# Altium PCB Jlink_V9.PcbDoc
Units mm, origin at the board's own origin, x right, y up, seen from the top; angles counter-clockwise.
Board outline 43 x 15.11 mm, 2 copper layers (Top Layer, Bottom Layer); 51 components, 39 nets, 205 pads, 94 vias.
Unrouted connection lines stored in the file: 4.
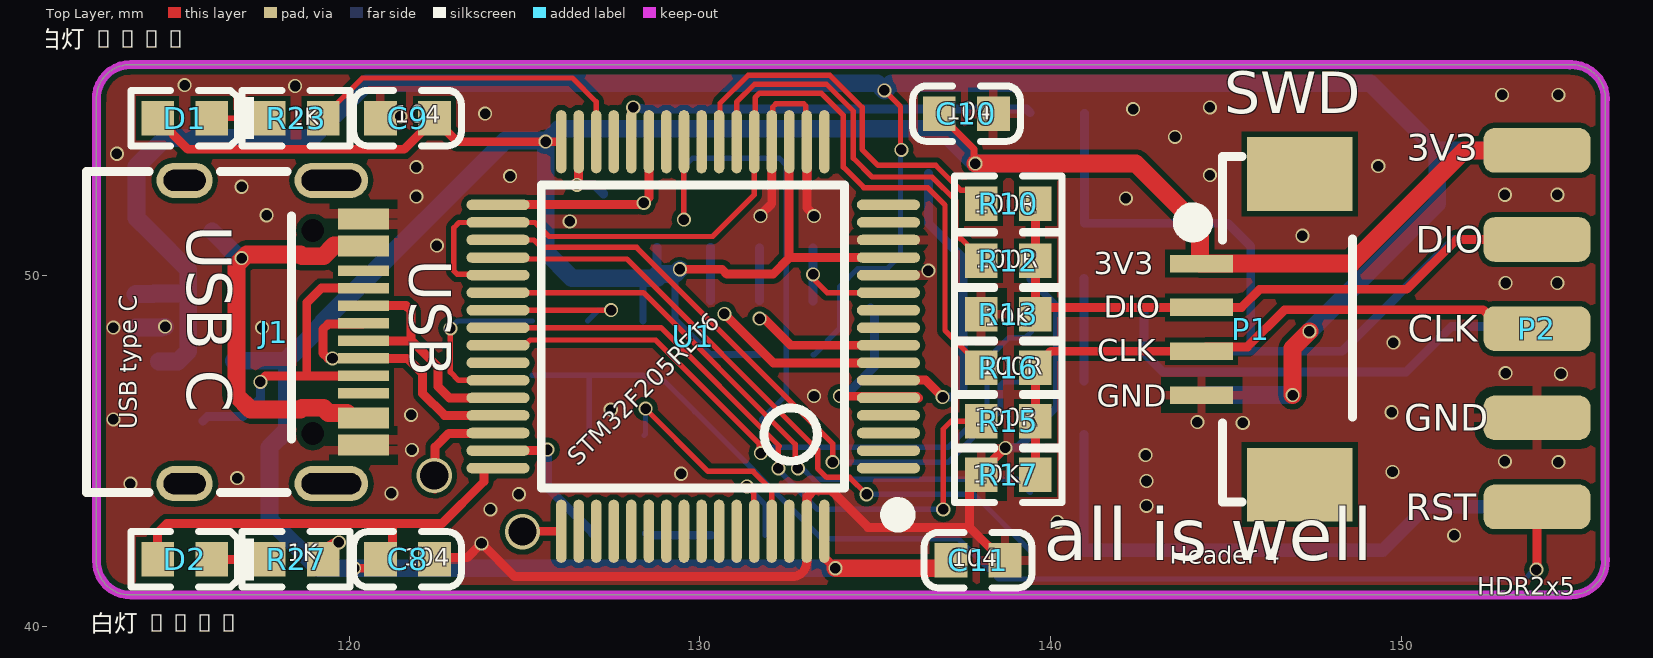
[diagram p0: Top Layer view]
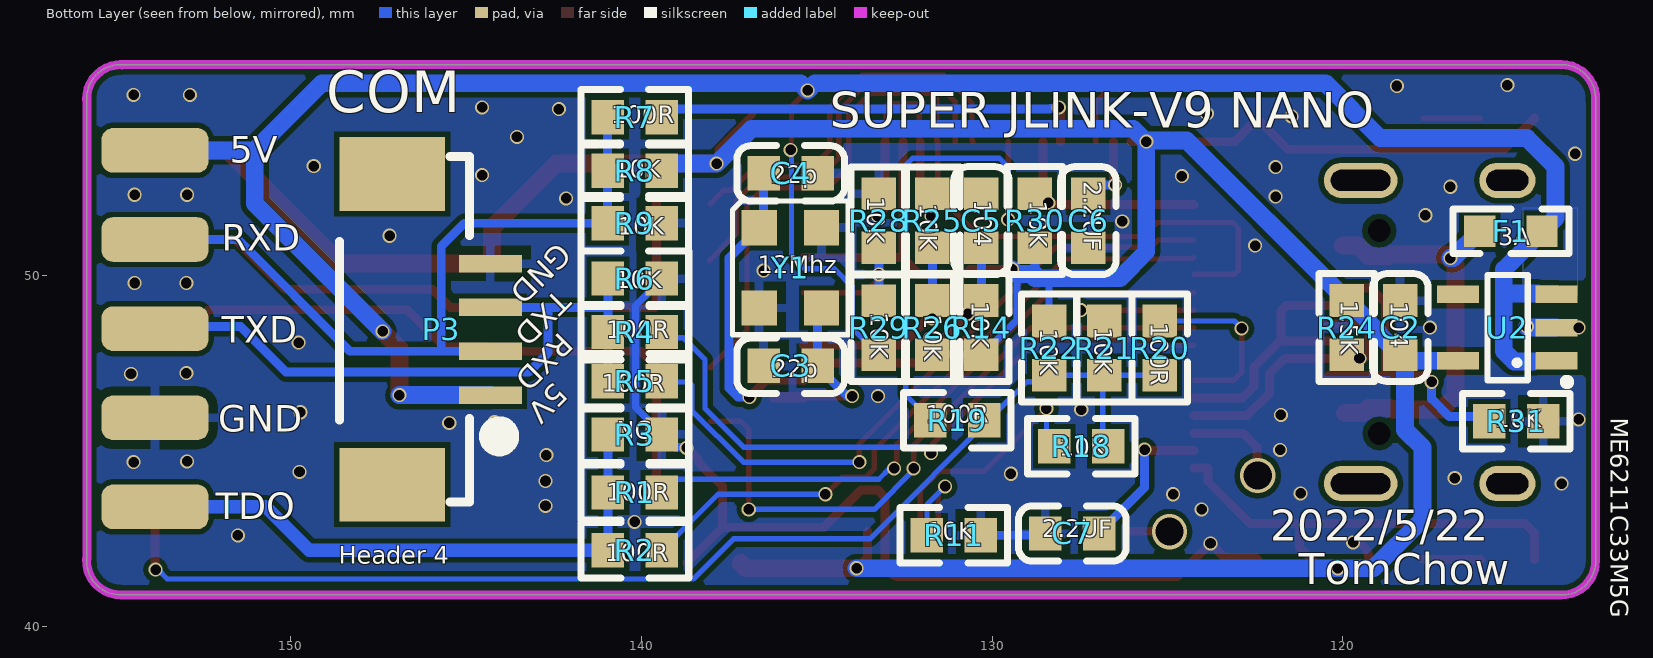
[diagram p1: Bottom Layer view, seen from below]
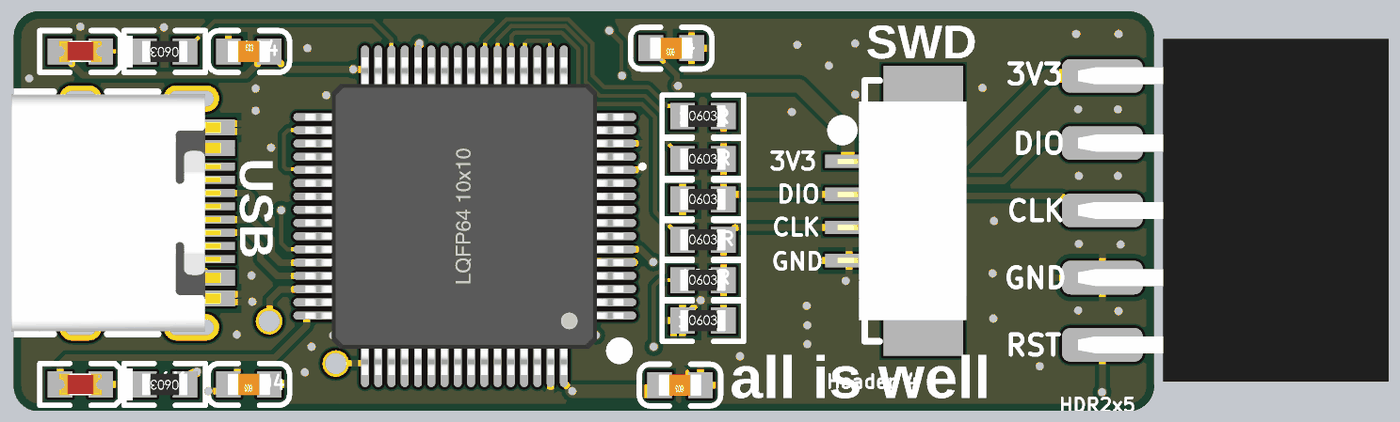
[diagram p2: 3D render of the assembled board from above, using the file's embedded part models]
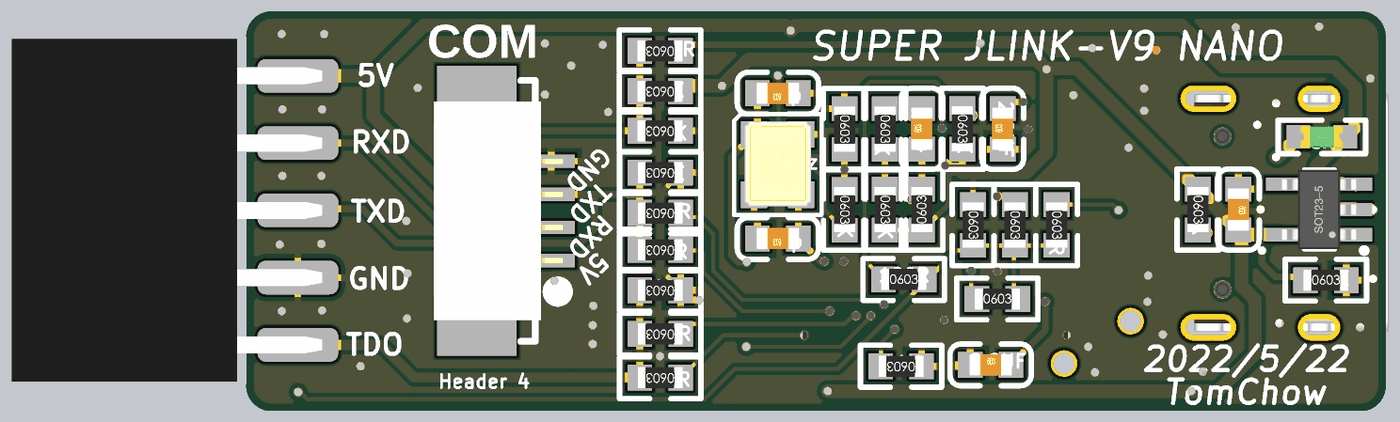
[diagram p3: 3D render of the assembled board from below, using the file's embedded part models]

## Layer stack, top to bottom
Top Solder: solder mask 0.0102, Solder Resist, Dk 3.5
Top Layer: signal copper 0.0356
Dielectric 1: dielectric 0.32, FR-4, Dk 4.8
Bottom Layer: signal copper 0.0356
Bottom Solder: solder mask 0.0102, Solder Resist, Dk 3.5

## Board outline
112.801,41.885 112.801,54.991 112.802,54.991 cw(c113.767,55.042) 113.792,56.007 154.838,56.007 154.783,56.002 cw(c154.834,55.038) 155.799,55.012 155.792,55.053 155.792,41.915 155.798,41.915 cw(c154.834,41.864) 154.808,40.899 154.808,40.894 113.792,40.894 113.817,40.895 cw(c113.767,41.859)

## Design rules (kind name [scope] priority, off if disabled: settings)
Clearance [All] p1: gap=0.152 ignorepadtopadclearanceinfootprint=FALSE
PolygonConnect isvia [IsVia] p1: connectstyle=Direct reliefconductorwidth=0.254 reliefentries=4 polygonreliefangle="90 Angle" airgapwidth=0.254
PolygonConnect [All] p2: connectstyle=Relief reliefconductorwidth=0.254 reliefentries=4 polygonreliefangle="90 Angle" airgapwidth=0.254
RoutingVias [All] p1: holewidth=0.3 width=0.4 viastyle="Through Hole" minholewidth=0.3 minwidth=0.4 maxholewidth=0.3 maxwidth=0.4
SolderMaskExpansion [All] p1: expansion=0.102 istentingtop=FALSE
Width [All] p1: maxlimit=0.508 minlimit=0.152 preferedwidth=0.254
30 further rules are at their usual default settings.

## Components (designator, comment, footprint, x,y, rotation, side; value= is the part's Value field where it differs from the comment)
C2 "104" LC-0603_C 118.364,48.514 r270 bottom value=105
C3 "22p" LC-0603_C 135.738,47.422 r0 bottom value=22
C4 "22p" LC-0603_C 135.738,52.908 r0 bottom value=22
C5 "104" LC-0603_C 130.302,51.562 r90 bottom
C6 "2.2UF" LC-0603_C 127.254,51.562 r90 bottom value=2.2uf
C7 "2.2UF" LC-0603_C 127.711,42.647 r180 bottom value=2.2uf
C8 "104" LC-0603_C 121.666,41.91 r180 top
C9 "104" LC-0603_C 121.666,54.483 r0 top
C10 "104" LC-0603_C 137.592,54.61 r180 top
C11 "104" LC-0603_C 137.922,41.885 r180 top
D1 "白灯 0603" 0603_LED_S1 115.316,54.483 r180 top
D2 "白灯 0603" 0603_LED_S1 115.316,41.91 r180 top
F1 "3A" "FU 0603" 115.214,51.257 r180 bottom
J1 "USB type C" "USB Type-C-16Pin_A" 115.316,48.387 r270 top
P1 "Header 4" SMT1.25_4P-90 147.091,48.463 r270 top
P2 "HDR2x5" HDR2X5_2.54_180HF 153.848,53.564 r0 top
P3 "Header 4" SMT1.25_4P-90 147.091,48.463 r90 bottom
R1 "100R" LC-0603_R 140.176,43.815 r0 bottom value=101
R2 "100R" LC-0603_R 140.176,42.164 r0 bottom value=101
R3 "NC" LC-0603_R 140.176,45.466 r0 bottom value=220K
R4 "100R" LC-0603_R 140.176,48.387 r0 bottom value=101
R5 "100R" LC-0603_R 140.176,46.99 r0 bottom value=101
R6 "10K" LC-0603_R 140.176,49.911 r0 bottom
R7 "100R" LC-0603_R 140.183,54.508 r0 bottom value=101
R8 "10K" LC-0603_R 140.183,52.984 r0 bottom
R9 "10K" LC-0603_R 140.183,51.486 r0 bottom
R10 "100R" LC-0603_R 138.787,52.045 r0 top value=101
R11 "10K" LC-0603_R 131.089,42.596 r0 bottom value=10K.
R12 "100R" LC-0603_R 138.787,50.419 r0 top value=101
R13 "10K" LC-0603_R 138.787,48.895 r0 top
R14 "10K" LC-0603_R 130.302,48.514 r90 bottom
R15 "100R" LC-0603_R 138.787,45.847 r0 top value=101
R16 "100R" LC-0603_R 138.787,47.371 r0 top value=101
R17 "10K" LC-0603_R 138.787,44.323 r0 top
R18 "10K" LC-0603_R 127.457,45.136 r180 bottom
R19 "100R" LC-0603_R 130.988,45.872 r180 bottom value=101
R20 "100R" LC-0603_R 125.222,47.93 r270 bottom value=101
R21 "10K" LC-0603_R 126.797,47.93 r270 bottom value=101
R22 "10K" LC-0603_R 128.372,47.93 r270 bottom
R23 "1K" LC-0603_R 118.491,54.483 r180 top value=102
R24 "1.5K" LC-0603_R 119.888,48.514 r270 bottom
R25 "10K" LC-0603_R 131.699,51.554 r270 bottom
R26 "10K" LC-0603_R 131.699,48.514 r270 bottom
R27 "1K" LC-0603_R 118.491,41.91 r180 top value=102
R28 "10K" LC-0603_R 133.223,51.554 r270 bottom value=103
R29 "10K" LC-0603_R 133.223,48.506 r270 bottom
R30 "10K" LC-0603_R 128.778,51.562 r270 bottom
R31 "10K" LC-0603_R 115.062,45.847 r180 bottom
U1 "STM32F205RET6" "LQFP64 10x10_N" 129.794,48.26 r90 top
U2 "ME6211C33M5G" SOT23-5N 115.319,48.514 r90 bottom
Y1 "12Mhz" OSC-3225 135.687,50.19 r180 bottom

## Footprints (in the part's own frame and the unit in brackets; to place one, negate y for a bottom-side part, rotate by r counter-clockwise, add the part's x,y. Pads: shape width x height; smd on the part's side, far side on the other; paste and mask are expansions set on the pad)
0603_LED_S1 [mm]
  rect 0.93x0.98 smd: A(0.77,0) K(-0.77,0)
  silkscreen extent -1.97,-0.79 1.54,0.79, body extent -0.8,-0.4 0.8,0.4, height 0.6
"FU 0603" [mil] "贴片保险丝"
  rect 35x35 smd: 1(-35,0) 2(35,0)
  silkscreen extent -65,-25 65,25, body extent -31,-16 31,16, height 20
HDR2X5_2.54_180HF [mil]
  rrect50% 120x50 smd: 1(0,0) 3(0,-100) 5(0,-200) 7(0,-300) 9(0,-400)
  rrect50% 120x50 smd far side: 2(0,0) 4(0,-100) 6(0,-200) 8(0,-300) 10(0,-400)
  body extent -36,-455 425,55, height 76
LC-0603_C [mm]
  rect 0.93x0.98 smd: 1(-0.77,0) 2(0.77,0)
  silkscreen extent -1.53,-0.79 1.54,0.79, body extent -0.8,-0.4 0.8,0.4, height 0.3
LC-0603_R [mm]
  rect 0.93x0.98 smd: 1(-0.77,0) 2(0.77,0)
  silkscreen extent -1.53,-0.79 1.54,0.79, body extent -0.85,-0.4 0.85,0.4, height 0.56
"LQFP64 10x10_N" [mm] "64脚，体宽10x10mm，脚距0.5mm"
  oval 0.3x1.8 smd: 1(-3.75,-5.575) 2(-3.25,-5.575) 3(-2.75,-5.575) 4(-2.25,-5.575) 5(-1.75,-5.575) 6(-1.25,-5.575) 7(-0.75,-5.575) 8(-0.25,-5.575) 9(0.25,-5.575) 10(0.75,-5.575) 11(1.25,-5.575) 12(1.75,-5.575) 13(2.25,-5.575) 14(2.75,-5.575) 15(3.25,-5.575) 16(3.75,-5.575) 33(3.75,5.55) 34(3.25,5.55) 35(2.75,5.55) 36(2.25,5.55) 37(1.75,5.55) 38(1.25,5.55) 39(0.75,5.55) 40(0.25,5.55) 41(-0.25,5.55) 42(-0.75,5.55) 43(-1.25,5.55) 44(-1.75,5.55) 45(-2.25,5.55) 46(-2.75,5.55) 47(-3.25,5.55) 48(-3.75,5.55)
  oval 1.8x0.3 smd: 17(5.55,-3.75) 18(5.55,-3.25) 19(5.55,-2.75) 20(5.55,-2.25) 21(5.55,-1.75) 22(5.55,-1.25) 23(5.55,-0.75) 24(5.55,-0.25) 25(5.55,0.25) 26(5.55,0.75) 27(5.55,1.25) 28(5.55,1.75) 29(5.55,2.25) 30(5.55,2.75) 31(5.55,3.25) 32(5.55,3.75) 49(-5.55,3.75) 50(-5.55,3.25) 51(-5.55,2.75) 52(-5.55,2.25) 53(-5.55,1.75) 54(-5.55,1.25) 55(-5.55,0.75) 56(-5.55,0.25) 57(-5.55,-0.25) 58(-5.55,-0.75) 59(-5.55,-1.25) 60(-5.55,-1.75) 61(-5.55,-2.25) 62(-5.55,-2.75) 63(-5.55,-3.25) 64(-5.55,-3.75)
  silkscreen extent -5.33,-6.09 4.32,4.32, body extent -6,-6 6,6, height 1.45
OSC-3225 [mm]
  rect 1x1 smd: 1(-0.945,1.167) 2(-0.945,-1.119) 3(0.833,-1.119) 4(0.833,1.167)
  silkscreen extent -1.71,-1.88 1.6,1.93, body extent -1.3,-1.55 1.2,1.65, height 0.65
SMT1.25_4P-90 [mm]
  rect 2.1x3 smd: 0(-4.425,0) 0(4.425,0)
  rect 0.5x1.8 smd: 1(-1.875,-2.8) 2(-0.625,-2.8) 3(0.625,-2.8) 4(1.875,-2.8)
  silkscreen extent -4.92,-3.3 4.92,1.5, body extent -4.12,-3.22 4.13,1.63, height 4.25
SOT23-5N [mm] "3x1.6x1.1mm(长宽高)"
  rect 0.5x1.2 smd: 1(-0.95,-1.4) 2(0,-1.4) 3(0.95,-1.4) 4(0.95,1.4) 5(-0.95,1.4)
  silkscreen extent -1.63,-1.78 1.5,0.56, body extent -1.5,-1.4 1.5,1.4, height 1.15
"USB Type-C-16Pin_A" [mm]
  round 0 hole 0.65: 0(-2.89,3.65) 0(2.89,3.65)
  oval 1x2.1 hole 0.6 slot 1.7 at 90 deg: 1(-4.32,4.18) 1(4.32,4.18)
  oval 1x1.6 hole 0.6 slot 1.2 at 90 deg: 1(-4.32,0) 1(4.32,0)
  rect 0.3x1.45 smd: A1(-3.375,5.092) A4(-2.6,5.092) A5(-1.25,5.092) A6(-0.25,5.092) A7(0.25,5.092) A8(-1.75,5.092) A9(2.6,5.1) A12(3.375,5.1) B1(3.075,5.1) B4(2.3,5.1) B5(1.75,5.092) B6(0.75,5.092) B7(-0.75,5.092) B8(1.25,5.092) B9(-2.3,5.092) B12(-3.075,5.092)
  silkscreen extent -4.57,-2.79 4.57,3.05, body extent -4.47,-2.6 4.47,5.3, height 3.25

## Part data
C2 C3 C4 C5 C6 C7 C8 C9 C10 C11: library part Cap, "Polarized Capacitor (Radial)", Published=8-Jun-2000, Publisher="Altium Limited", Revision="July-2002: Re-released for DXP Platform."
D1 D2: library part "0603 白灯", "发光二极管", Package=0603, SuppliersPartNumber=C2290, ComponentLink1Description=供应商链接, ComponentLink1URL=http://www.szlcsc.com/product/details_2663.html, Supplier=LC
F1: library part FU, "贴片保险丝", BOM名称=贴片保险丝, 学习资源=www.ooocke.com, 版权归属=源创客
J1: library part USB_C
P1 P3: "Header, 4-Pin", LatestRevisionDate=17-Jul-2002, LatestRevisionNote="Re-released for DXP Platform.", Publisher="Altium Limited"
P2: library part HDR2x5_2.54, "Header"
R1 R2 R3 R4 R5 R6 R7 R8 R9 R10 R11 R12 R13 R14 R15 R16 R17 R18 R19 R20 R21 R22 R23 R25 R26 R27 R28 R29 R30: library part Resistor, "Resistor Chip", Published=8-Jun-2000, Publisher="Altium Limited", Revision="July-2002: Re-released for DXP Platform."
R24 R31: library part Res2, "Resistor", LatestRevisionDate=17-Jul-2002, LatestRevisionNote="Re-released for DXP Platform.", PackageReference=AXIAL-0.4, Published=8-Jun-2000, Publisher="Altium Limited"
U1: "Microcontroller   ST", Brand=ST, Code=104261, InitialReleaseDate=25-Mar-2015, LatestRevisionDate=25-Mar-2015, PackageReference=SQFP10x10-64, Vision=V5.0
U2: library part RT9193-33, "3.3V超低压差LDO"
Y1: library part XTAL, "=Description"

## Via types
v1: diameter 0.4, hole 0.3, Top Layer to Bottom Layer, tented both sides, 92 vias
v2: diameter 1, hole 0.8, Top Layer to Bottom Layer, 2 vias

## Nets (pads, with @x,y where several pads share a name; then routed paths per layer and width w, separated by ;. In a path a pad name is that pad's centre, name@x,y a point inside that pad or via, vN(x,y) a via of type N, cw(c..) or ccw(c..) an arc to the next point about the centre after c; other vN are vias at no path point)
3V3: C2.2 C8.2 C9.2 C10.2 C11.2 D1.A D2.A P1.1 P2.1 R8.1 R14.1 R22.1 R24.1 R26.2 R30.2 U1.13 U1.19 U1.32 U1.48 U1.64 U2.5 | length 122
  Top Layer w0.203: C10.2 136.822,54.585 137.808,53.599 137.808,53.225 v1(137.846,53.188)
  Top Layer w0.254: D2.A 114.546,42.664 114.808,42.926 121.234,42.926 ; D1.A 114.546,54.458 115.41,53.594 121.572,53.594 122.436,54.458 123.084,53.81 v1(125.603,53.81) U1.32 ; v1(120.142,41.656) 120.642,41.656 C8.2 121.234,42.248 121.234,42.926 ; U1.48 123.866,44.51 123.845,44.489 123.845,44.128 122.643,42.926 121.234,42.926 ; v1(129.424,50.176) 130.627,50.176 130.765,50.038 132.08,50.038 132.535,50.493 ; U1.19 132.535,53.801 132.535,50.493 ; U1.64 133.544,41.965 133.853,41.656 v1(133.858,41.656) ; U1.13 132.552,50.51 132.535,50.493
  Top Layer w0.508: v1(133.858,41.656) 137.025,41.656 C11.2@137.152,41.783 ; C11.2@137.156,41.787 C11.2@137.156,41.812 ; v1(137.846,53.188) 142.418,53.188 144.247,51.359 144.247,50.342 P1.1@144.251,50.338 ; P1.1 P1.1@144.251,50.338 ; P2.1 151.786,53.564 148.56,50.338 P1.1@144.251,50.338
  Bottom Layer w0.203: R22.1 128.372,49.895 128.397,49.921 ; v1@129.286,50.038 129.286,48.735 130.277,47.744 R14.1 R26.2
  Bottom Layer w0.254: 128.778,50.017 R30.2
  Bottom Layer w0.508: U2.5 116.723,47.568 117.221,47.568 117.224,47.571 117.726,47.571 117.729,47.568 118.188,47.568 C2.2@118.234,47.614 ; v1@125.603,53.721 125.603,50.673 126.355,49.921 128.397,49.921 128.778,49.921 128.778,50.017 128.799,50.038 129.286,50.038 v1(129.424,50.176) ; v1(133.858,41.656) v1(120.142,41.656) 119.126,41.656 117.729,43.053 117.729,45.093 118.234,45.599 C2.2@118.234,47.614 ; R8.1@139.413,53.086 139.311,53.188 v1(137.846,53.188) 136.852,54.181 125.974,54.181 v1(125.603,53.81) 125.603,53.848 124.452,53.848 R24.1 119.863,49.284 119.26,48.681 119.26,48.651 118.992,48.382 118.992,48.347 118.389,47.744 C2.2 C2.2@118.234,47.614
5V: F1.2 P2.2 P3.1 R29.2 U2.1 U2.3 | length 70.7
  Top Layer w0.152: v1(135.255,55.27) 135.712,54.813 135.712,53.6 v1(135.738,53.575)
  Top Layer w0.508: v1(146.884,46.588) 146.884,47.925 v1(147.367,48.409)
  Bottom Layer w0.152: R29.2 133.248,47.736 133.637,48.125 133.637,48.15 133.985,48.498 133.985,49.682 134.493,50.19 135.331,50.19 135.712,50.571 135.712,53.549 v1(135.738,53.575)
  Bottom Layer w0.508: U2.3 113.923,49.468 114.419,49.468 114.438,49.486 115.418,49.486 ; 114.579,47.549 115.12,47.549 115.418,47.846 115.418,49.486 ; P3.1 v1(146.884,46.588) v1@146.888,46.584 ; v1(147.367,48.409) 151.008,52.049 151.008,53.564 ; P2.2 151.008,53.564 ; 115.418,49.486 115.418,50.165 F1.2 113.944,51.638 113.944,53.101 114.755,53.911 118.935,53.911 120.498,55.474 135.052,55.474 v1(135.255,55.27) 135.458,55.474 149.098,55.474 151.008,53.564
cc1: J1.A5 J1.B8 R31.1 | length 9.3
  Top Layer w0.254: v1(117.475,46.965) 117.475,46.988 117.624,47.137 118.796,47.137 ; J1.B8 118.796,47.137 ; J1.A5 119.208,49.637 118.796,49.225 118.796,47.137
  Bottom Layer w0.254: R31.1 115.962,45.977 116.97,45.977 117.475,46.482 v1(117.475,46.965)
GND: C2.1 C3.2 C4.1 C5.2 C6.1 C7.1 C8.1 C9.1 C10.1 C11.1 J1.A1 J1.A12 J1.B1 J1.B12 P1.4 P2.7 P2.8 P3.4 R3.1 R6.1 R9.1 R11.1 R13.1 R17.1 R25.1 R27.1 R28.1 R31.2 U1.12 U1.14 U1.18 U1.20 U1.63 U2.2 Y1.2 Y1.4 | length 39.4
  Top Layer w0.152: U1.20 132.072,53.838 132.072,54.8 132.162,54.889 132.956,54.889 133.016,54.83 133.016,53.838 U1.18
  Top Layer w0.254: R27.1 119.261,41.943 cw(c119.71,41.943) v1(119.71,42.393) ; C8.1 122.487,41.961 123.368,41.961 v1(123.774,42.367) 124.726,41.415 132.613,41.415 ccw(c132.613,41.846) 133.044,41.846 U1.63 133.053,42.719 133.053,43.685 133.257,43.889 133.722,43.889 134.79,42.821 137.679,42.821 ; v1(131.724,51.689) 131.724,51.729 132.044,52.048 U1.20 ; U1.18 133.044,51.933 133.248,51.729 v1(133.248,51.689) ; C11.1@138.692,41.808 137.679,42.821 ; v1(138.7,45.087) 138.355,44.742 138.355,44.661 137.679,43.985 137.679,42.821
  Bottom Layer w0.203: R3.1 139.406,45.491 140.157,46.242 140.157,49.135 139.406,49.886 R6.1
  Bottom Layer w0.254: C7.1 128.532,42.596 R11.1 ; v1(138.7,45.087) 138.718,45.105 139.068,45.105 139.406,45.443 R3.1
  Bottom Layer w0.508: U2.2 113.923,48.518 114.66,48.518 114.681,48.539 v1(114.757,48.539)
  other v1: 151.486,42.596 140.183,42.977 124.028,43.332 142.723,43.431 124.841,43.764 121.209,43.79 113.767,44.069 142.723,44.142 116.815,44.221 129.464,44.348 149.733,44.399 154.457,44.679 152.933,44.704 142.697,44.882 121.793,45.031 145.466,45.796 144.17,45.822 113.284,45.898 121.768,46.025 149.708,46.101 127.457,46.177 133.248,46.558 154.534,47.193 152.959,47.219 149.758,48.082 113.284,48.514 117.526,48.514 152.959,49.784 154.432,49.784 136.506,50.137 122.504,50.851 147.168,51.13 126.289,51.54 117.653,51.714 142.138,52.197 121.92,52.248 152.933,52.299 154.432,52.299 116.942,52.527 124.587,52.832 144.526,52.857 121.92,53.086 149.327,53.111 113.386,53.467 143.535,53.95 121.463,54.534 123.876,54.61 142.342,54.737 144.526,54.788 152.857,55.143 154.457,55.143 118.466,55.397 115.316,55.423
LED: R23.1 U1.30 | length 9.7
  Top Layer w0.152: R23.1 119.261,54.508 120.379,55.626 126.363,55.626 127.044,54.945 U1.30
NetC5_1: C5.1 R14.2 U1.7 | length 6.8
  Top Layer w0.254: v1(130.694,48.906) 132.09,47.51 U1.7
  Bottom Layer w0.254: R14.2 C5.1
NetC6_2: C6.2 U1.31 | length 2.1
  Top Layer w0.254: v1(126.492,52.578) 126.544,52.63 U1.31
  Bottom Layer w0.254: v1(126.492,52.578) 126.992,52.578 127.246,52.324 C6.2
NetC7_2: C7.2 U1.47 | length 4.3
  Top Layer w0.254: U1.47 125.63,45.01 v1(125.654,45.034)
  Bottom Layer w0.254: v1(125.654,45.034) 125.654,43.959 126.941,42.672 C7.2
NetD1_K: D1.K R23.2 | length 1.6
  Top Layer w0.152: D1.K R23.2
NetD2_K: D2.K R27.2 | length 1.6
  Top Layer w0.254: D2.K R27.2
NetJ1_0: J1.0
NetR11_2: R11.2 U1.60 | length 3
  Top Layer w0.152: v1(131.336,43.988) 131.532,43.792 131.532,42.722 U1.60
  Bottom Layer w0.152: v1(131.336,43.988) 131.851,43.472 131.851,42.604 R11.2
OSC1: C3.1 U1.5 Y1.3 | length 6.2
  Top Layer w0.254: v1(133.985,46.558) 136.178,46.558 136.227,46.51 U1.5
  Bottom Layer w0.254: v1(133.985,46.558) 134.129,46.558 134.968,47.397 C3.1 134.968,48.958 Y1.3
OSC2: C4.2 U1.6 Y1.1 | length 9
  Top Layer w0.254: U1.6 135.378,47.019 136.427,47.019 v1(136.913,46.533)
  Bottom Layer w0.254: C4.2 136.508,51.482 Y1.1 137.49,50.499 137.49,46.787 137.236,46.533 v1(136.913,46.533)
PA5: R16.1 U1.21 U1.34 U1.37 | length 27.3
  Top Layer w0.152: U1.37 124.216,50.038 123.076,50.038 122.987,50.127 122.987,51.359 123.138,51.51 U1.34 125.299,51.51 125.698,51.111 130.359,51.111 131.544,52.296 U1.21 131.572,53.838 131.572,55.067 131.699,55.194 133.452,55.194 134.087,54.559 134.087,53.086 134.671,52.502 136.488,52.502 136.982,52.008 136.982,48.431 138.017,47.396 R16.1
PA6: R12.1 U1.22 | length 11.8
  Top Layer w0.152: U1.22 131.044,54.939 131.554,55.448 133.6,55.448 134.366,54.683 134.366,53.34 134.899,52.807 136.615,52.807 137.287,52.134 137.287,51.181 137.42,51.048 137.437,51.048 138.041,50.444 R12.1@138.041,50.419
PA7: R10.1 U1.23 | length 11.1
  Top Layer w0.152: U1.23 130.572,53.838 130.572,54.906 131.369,55.702 133.706,55.702 134.62,54.788 134.62,53.594 135.077,53.137 136.718,53.137 137.427,52.428 137.633,52.428 R10.1
PA8: R4.1 U1.41 | length 19
  Top Layer w0.152: U1.41 125.009,48.01 125.157,48.158 128.735,48.158 131.693,45.2 131.693,44.976 v1(131.732,44.938)
  Bottom Layer w0.152: v1(131.732,44.938) 131.902,45.107 137.081,45.107 138.176,46.203 138.176,47.6 138.802,48.225 139.276,48.225 R4.1@139.438,48.387
PA10: R20.1 U1.43 | length 5.1
  Top Layer w0.152: v1(122.885,48.489) 122.885,47.244 123.119,47.01 U1.43
  Bottom Layer w0.152: v1(122.885,48.489) 123.096,48.7 R20.1
PB1: R30.1 U1.27 U1.33 | length 6
  Top Layer w0.254: U1.33 124.253,52.019 125.035,52.019 128.243,52.019 128.266,52.042 128.369,52.042 128.544,52.217 U1.27
  other v1: 128.397,52.07
PB2: R7.1 U1.28 | length 12.4
  Top Layer w0.254: U1.28 128.053,53.819 128.053,54.706 128.098,54.751 v1(128.098,54.791)
  Bottom Layer w0.254: v1(128.098,54.791) 128.126,54.763 128.336,54.763 128.362,54.737 139.31,54.737 R7.1@139.411,54.635
PB8: R18.1 U1.61 | length 6.6
  Top Layer w0.152: v1@128.397,46.253 130.233,44.417 131.513,44.417 132.044,43.886 U1.61
  Bottom Layer w0.152: R18.1@128.405,45.441 128.448,45.483 v1(128.448,46.203)
PB14: R5.1 U1.35 | length 19.5
  Top Layer w0.152: U1.35 125.266,51.01 125.476,50.8 128.194,50.8 133.782,45.212 v1(133.782,44.679)
  Bottom Layer w0.152: v1(133.782,44.679) 137.083,44.679 138.557,46.153 138.557,46.876 138.646,46.965 R5.1@139.438,46.965
PB15: R2.1 U1.36 | length 18.9
  Top Layer w0.152: U1.36 124.272,50.482 125.127,50.482 125.139,50.47 127.914,50.47 133.352,45.032 133.352,44.502 133.609,44.245 134.266,44.245 v1(134.747,43.764)
  Bottom Layer w0.152: v1(134.747,43.764) 137.806,43.764 R2.1
PC0: R25.2 R26.1 U1.8 | length 5.5
  Top Layer w0.254: v1(131.699,48.768) 131.826,48.768 132.584,48.01 U1.8
  Bottom Layer w0.254: R26.1 R25.2
PC3: R28.2 R29.1 U1.11 | length 3.9
  Top Layer w0.152: v1(133.223,50.03) 133.223,49.911 133.624,49.51 U1.11
  Bottom Layer w0.254: R29.1 v1(133.223,50.03) R28.2
PC5: R19.1 U1.25 | length 14.4
  Top Layer w0.152: v1(129.54,51.587) 129.542,51.589 129.542,53.808 U1.25
  Bottom Layer w0.152: v1(129.54,51.587) 129.54,53.086 129.794,53.34 132.258,53.34 132.461,53.137 132.461,46.601 131.758,45.897 R19.1
PC7: R1.1 U1.38 | length 17.9
  Top Layer w0.152: U1.38 128.392,49.51 132.715,45.187 132.715,44.714 132.744,44.685 132.744,44.548 v1(132.791,44.501)
  Bottom Layer w0.152: v1(132.791,44.501) 132.918,44.501 133.226,44.193 139.028,44.193 R1.1
PC8: R21.1 U1.39 | length 4
  Top Layer w0.152: U1.39 v1(127.471,49.01)
  Bottom Layer w0.152: R21.1 127.107,49.01 v1(127.471,49.01)
PC9: R15.1 U1.40 | length 18.7
  Top Layer w0.152: U1.40 128.884,48.51 132.258,45.136 132.232,45.11 v1(132.232,44.501) ; v1(136.931,43.332) 136.931,45.618 137.16,45.847 R15.1
  Bottom Layer w0.152: v1(132.232,44.501) 132.232,44.453 133.353,43.332 v1(136.931,43.332)
RST: P2.9 R18.2 R19.2 R20.2 R21.2 R22.2 | length 34.7
  Top Layer w0.254: v1@153.822,41.605 v1(153.835,41.618) 153.848,41.631 P2.9
  Bottom Layer w0.152: R20.2 R21.2 ; R18.2@126.84,45.415 126.84,47.117 R21.2 ; v1(153.835,41.618) 153.768,41.618 153.501,41.351 138.506,41.351 137.363,42.494 133.477,42.494 129.854,46.118 129.001,46.97 128.561,46.97 R22.2 R21.2
RXD: P2.4 P3.2 R7.2 R8.2 R9.2 | length 22
  Bottom Layer w0.254: R7.2@140.953,54.61 140.953,53.086 R9.2 145.034,51.486 145.694,50.825 145.694,47.838 ; P3.2 145.694,47.838 ; P2.4 151.481,51.024 148.295,47.838 145.694,47.838
TCK: P1.3 P2.5 R15.2 R16.2 R17.2 | length 18.3
  Top Layer w0.254: R17.2@139.581,44.323 139.557,44.347 R15.2 R16.2 139.557,47.396 139.999,47.838 P1.3 144.414,47.961 145.599,47.961 146.66,49.022 152.318,49.022 152.856,48.484 P2.5
TDI-Y: P2.6 P3.3 R4.2 R5.2 R6.2 | length 19.6
  Bottom Layer w0.254: R5.2 R4.2 140.946,49.149 ; R6.2 140.946,49.149 ; P3.3 142.649,49.088 ; P2.6 153.792,48.539 151.409,48.539 150.114,47.244 143.205,47.244 142.649,47.8 142.649,49.088 ; 140.946,49.149 141.007,49.088 142.649,49.088
TDO: P2.10 R1.2 R2.2 R3.2 | length 16.7
  Bottom Layer w0.254: R2.2@140.946,42.18 R1.2 R3.2
  Bottom Layer w0.381: R2.2@140.946,42.18 140.962,42.164 149.454,42.164 150.693,43.404 P2.10
TMS: P1.2 P2.3 R10.2 R12.2 R13.2 | length 18
  Top Layer w0.254: R10.2 R12.2 139.557,49.149 139.618,49.088 145.43,49.088 145.948,49.606 150.139,49.606 151.557,51.024 P2.3
USB_5V: F1.1 J1.A4 J1.A9 J1.B4 J1.B9 | length 11.8
  Top Layer w0.508: J1.B4@119.945,46.081 119.417,46.081 119.269,46.229 118.663,46.229 118.612,46.178 117.195,46.178 116.789,46.584 116.789,50.299 116.964,50.473 117.087,50.597 118.612,50.597 118.663,50.546 119.269,50.546 119.574,50.851 J1.A4@120.003,50.851
  Bottom Layer w0.508: F1.1 116.865,50.495 v1(116.942,50.495)
USB_DM: J1.A7 J1.B7 U1.44 | length 7.1
  Top Layer w0.254: J1.A7 120.412,48.133 121.793,48.133 122.53,47.396 122.53,46.838 122.857,46.51 U1.44 ; J1.B7 121.619,49.137 121.768,48.988 121.768,48.133
USB_DP: J1.A6 J1.B6 R24.2 U1.45 | length 8
  Top Layer w0.254: J1.A6 120.385,48.614 119.402,48.614 119.253,48.465 119.253,47.786 119.402,47.637 v1(119.529,47.637) J1.B6 121.654,47.637 122.098,47.193 122.098,46.634 122.722,46.01 U1.45
pads on no net: J1.1 J1.A8 J1.B5 P1.0 P3.0 U1.1 U1.2 U1.3 U1.4 U1.9 U1.10 U1.15 U1.16 U1.17 U1.24 U1.26 U1.29 U1.42 U1.46 U1.49 U1.50 U1.51 U1.52 U1.53 U1.54 U1.55 U1.56 U1.57 U1.58 U1.59 U1.62 U2.4
copper on no net: | length 4.3
  Top Layer w0.254: v2@122.453,43.917 122.453,45.11 122.844,45.501 124.235,45.501 124.244,45.51 ; v2(124.943,42.697) 124.955,42.71 126.044,42.71
  other v2: 122.428,44.298

## Polygon pours and split planes (outlines as drawn)
GND on Top Layer "NONET_L-01_P-001" (solid, pour order 1): 112.792,56.022 155.795,56.022 155.795,40.909 112.817,40.909
GND on Bottom Layer "NONET_L-01_P-001" (solid, pour order 4): 112.78,56.039 155.782,56.039 155.782,40.926 112.805,40.926
5V on Bottom Layer "NONET_L-01_P-001" (solid, pour order 2): 113.309,51.918 114.871,51.918 114.871,49.428 113.309,49.428

## Keep-outs
Keep-Out Layer:
  lines w0.254: 112.801,54.991 112.801,41.935 112.801,41.885 ccw(c113.767,41.859) 113.817,40.895 ; 112.802,54.991 cw(c113.767,55.042) 113.792,56.007 154.838,56.007 ; 113.792,40.894 154.808,40.894 ; 154.783,56.002 cw(c154.834,55.038) 155.799,55.012 ; 154.808,40.899 ccw(c154.834,41.864) 155.798,41.915 ; 155.792,41.915 155.792,55.053

## Silkscreen, mask and mechanical layers (free items; w line width, h text height)
Top Overlay:
  text "SWD" at 144.932,54.229 h2.03
  text "3V3" at 150.139,53.264 h0.76
  text "DIO" at 150.393,50.648 h0.76
  text "USB" at 121.336,50.444 h2.03 r270
  text "3V3" at 141.224,50.038 h0.64
  text "DIO" at 141.503,48.793 h0.64
  text "CLK" at 150.165,48.108 h0.76
  text "CLK" at 141.326,47.549 h0.64
  text "GND" at 141.3,46.253 h0.64
  text "GND" at 150.063,45.568 h0.76
  text "RST" at 150.114,43.028 h0.76
  text "all is well" at 139.802,41.402 h2.54
Bottom Overlay:
  text "COM" at 148.971,54.254 h2.03
  text "SUPER JLINK-V9 NANO" at 134.62,54.204 h1.02
  text "5V" at 151.714,53.213 h0.76
  text "GND" at 142.367,50.978 h0.64 r135
  text "RXD" at 151.943,50.698 h0.76
  text "TXD" at 142.392,49.632 h0.64 r135
  text "RXD" at 142.316,48.412 h0.64 r135
  text "TXD" at 151.943,48.082 h0.76
  text "5V" at 142.469,46.99 h0.64 r135
  text "GND" at 152.044,45.542 h0.76
  text "TDO" at 152.121,43.053 h0.76
  text "2022/5/22" at 122.072,42.443 h0.89
  text "TomChow" at 121.26,41.199 h0.89

## Text inside footprints (layer, text, board x,y; h text height)
J1: Top Overlay "USB C" at 115.392,51.435 h1.27 r270